# Altium PCB SensorBoard.PcbDoc (part 2 of 5)
Units mm, origin at the board's own origin, x right, y up, seen from the top; angles counter-clockwise.
Board outline 133.86 x 67.84 mm, 4 copper layers (Top Layer, Power Plane, Ground Plane, Bottom Layer), stack 1.586 mm thick; 244 components, 150 nets, 825 pads, 904 vias.
Unrouted connection lines stored in the file: 43.
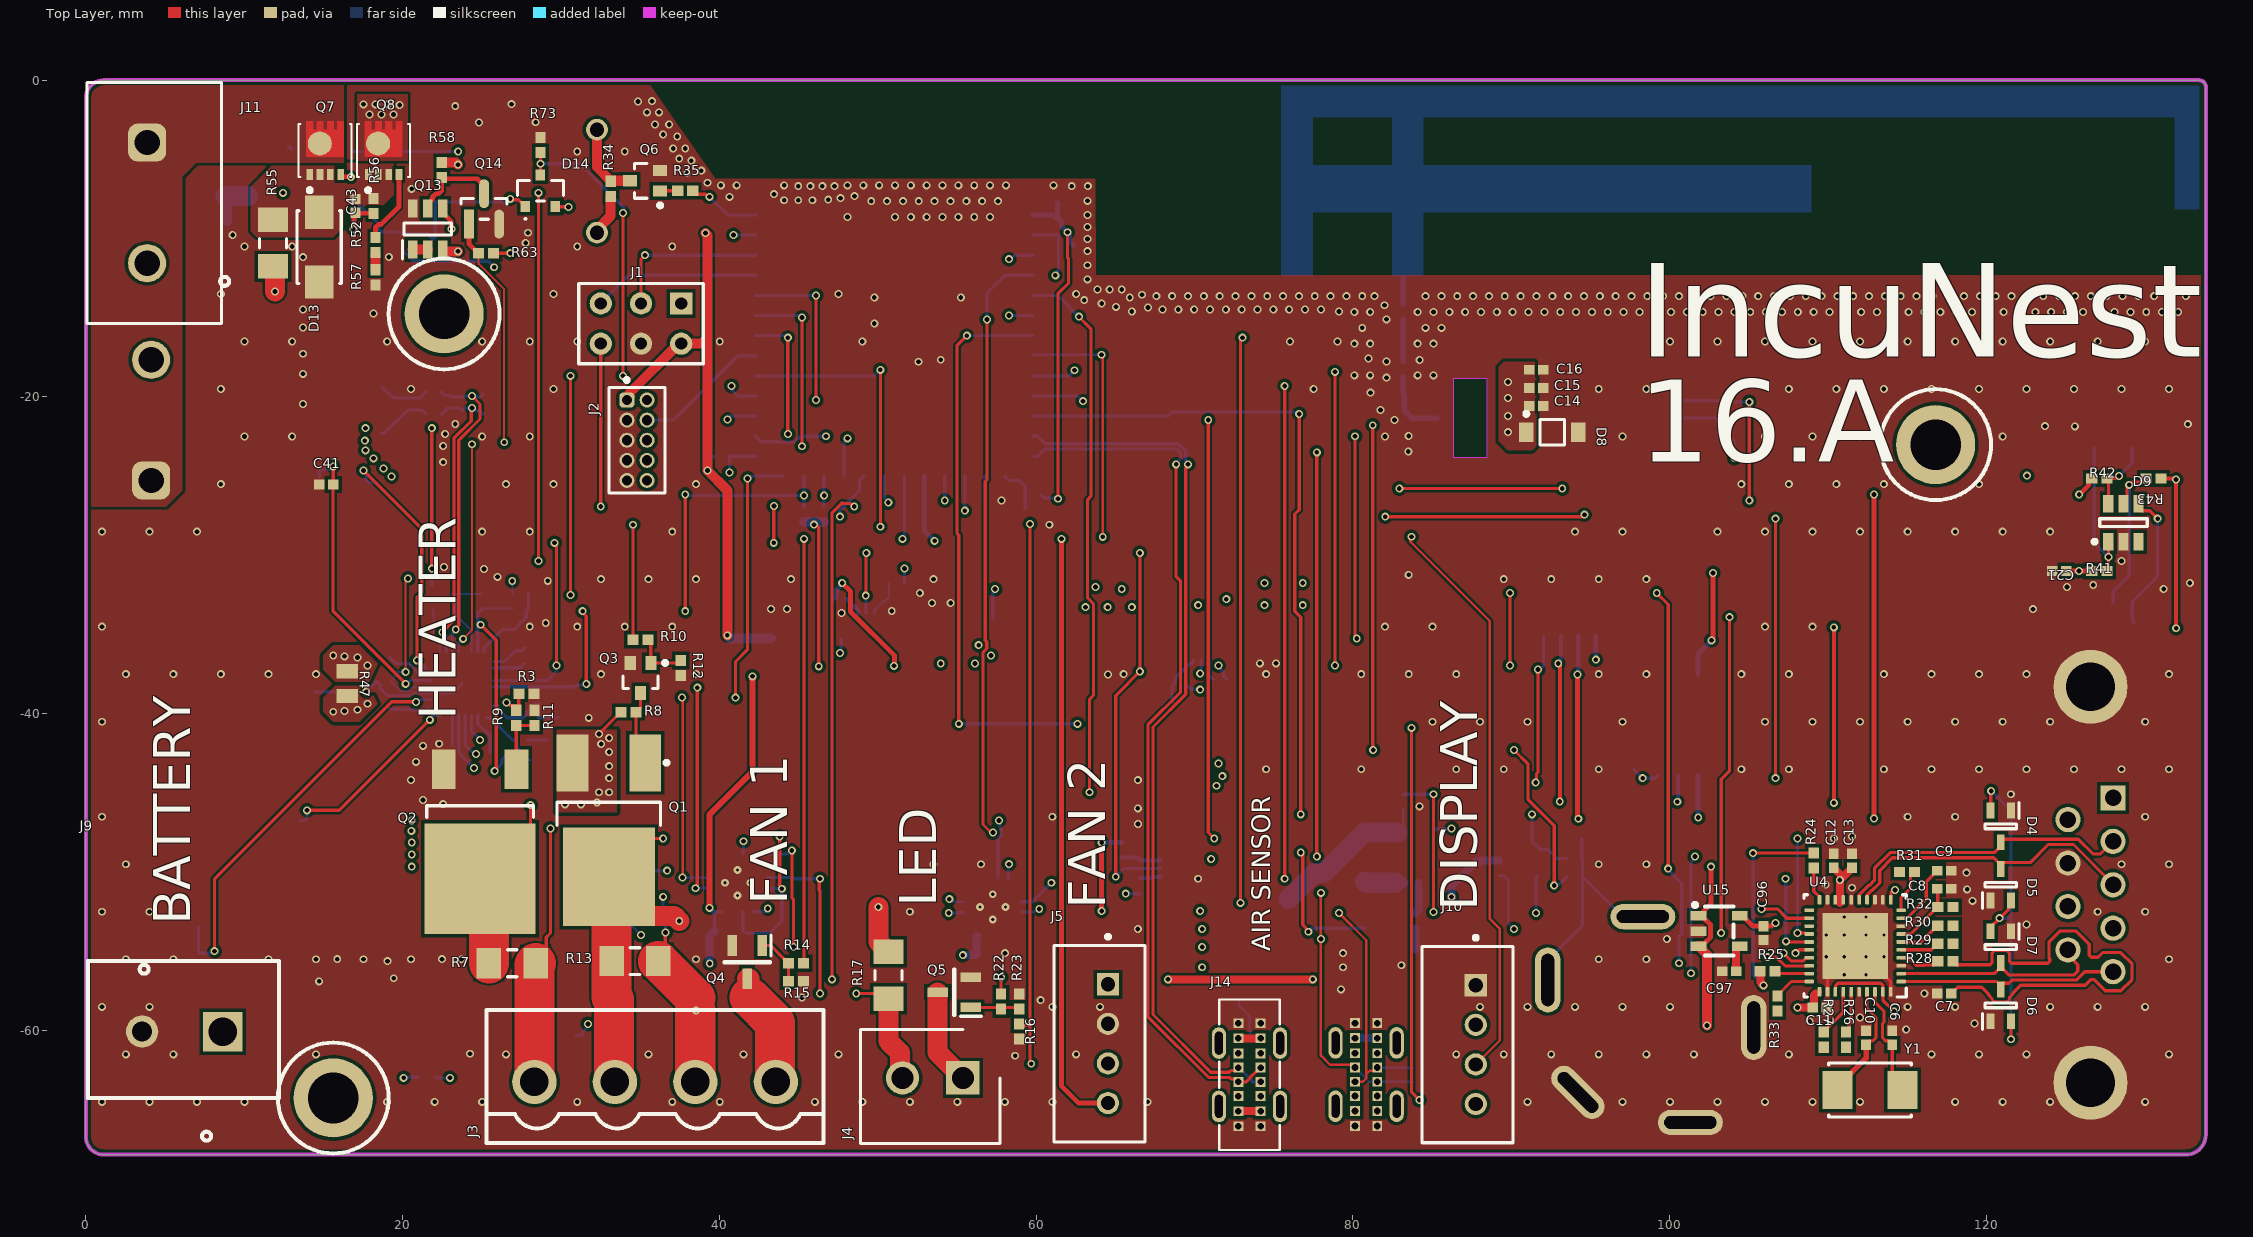
[diagram p0: Top Layer view]

## Part data (continued)
D13: library part CMP-08607-000031-1, "TVS DIODE 26V 42.1V DO214AC", Breakdown Voltage=28.9V, Clamping Voltage=42.1V, LCSC_PN=C148226, Manufacturer="Littelfuse Inc", Max Junction Temp=+150°C, Package=SMAJ-CA, Peak Pulse Current=9.5A, Peak Pulse Power=400W, Reverse Standoff Voltage=26V, Temperature="-65°C to +150°C", Temperature Range Low=-65°C, Automotive=No, Category=Diode, ComponentLink2Description=Datasheet, ComponentLink2URL=https://www.littelfuse.com/~/media/electronics/datasheets/tvs_diodes/littelfuse_tvs_diode_smaj_datasheet.pdf.pdf, Device Class L1="Circuit Protection", Device Class L2="TVS Diodes", Device Class L3=unset, Digikey Description="TVS DIODE 26V 42.1V DO214AC", Direction=Bidirectional, Height=2.29mm, Lead Free=Yes, Manufacturer Part Number=SMAJ26CA, Mouser Description="SMAJ Series 42.1 V 0.4 kW Surface Mount Bi-Directional TVS Diode - DO-214AC", Number Of Channels=1, Octopart=https://octopart.com/smaj26ca-littelfuse-350028, RoHS=TRUE, Temperature Range High=+150°C
D14: library part CMP-0417-00003-1, "Schottky Barrier Diode, 30 V, 2 uA, -55 to 150 degC, 3-Pin SOT23, RoHS, Tape and Reel", LCSC_PN=C181200, Manufacturer="NXP Semiconductors", Temperature Range="-55 to 150 degC", Cd (pF)=10, ComponentLink1Description="Manufacturer URL", ComponentLink1URL=http://www.nxp.com/, ComponentLink2Description=Datasheet, ComponentLink2URL=http://www.nxp.com/documents/data_sheet/BAT54_SER.pdf, DatasheetVersion="Rev. 5", IR (uA)=2, Mounting Technology="Surface Mount", PackageDescription="3-Pin Plastic Surface-mounted Package, Body 1.3 x 2.9 mm, Pitch 0.95 mm", PackageReference=SOT23-3, Packing="Tape and Reel", PartNumber=BAT54C, RoHS=TRUE, Rth(j-a) (K/W)=500, Trr (ns)=5, VF (mV)=800, VR (V)=30
D15: library part CMP-2000-05974-1, "Surface Mount Zener Diode, 3 V, -65 to 150 degC, 2-Pin SOD123, RoHS, Tape and Reel", Ir - Reverse Current=10uA, LCSC_PN=C68542, Manufacturer=DiodesIncorporated, Maximum Operating Temperature=+150C, Minimum Operating Temperature=-65C, Package / Case=SOD-123, Package Description="2-Pin Surface Mount Device, Body 2.7 x 1.55 mm", Package Reference=SOD123, Pd - Power Dissipation=500mW, Voltage Temperature Coefficient=-1.75mV/C, Voltage Tolerance=5%, Vz - Zener Voltage=3V, Zener Current=5mA, Brand=DiodesIncorporated, Configuration=Single, Datasheet URL=http://www.diodes.com/_files/datasheets/ds18004.pdf, Datasheet Version="Rev. 37-2, 09/2012", Factory Pack Quantity=3000, Height=1.35mm, Length=2.85mm, Manufacturer URL=http://www.diodes.com/, Mounting Style=SMD/SMT, Mounting Technology=SurfaceMount, Packaging=Reel, Product Category=ZenerDiodes, RoHS=True, Series=BZT52C, Termination Style=SMD/SMT, Unit Weight=0.000353oz, Width=1.7mm, Zz - Zener Impedance=95Ohms